# Allegro board pultonpcbtest.brd
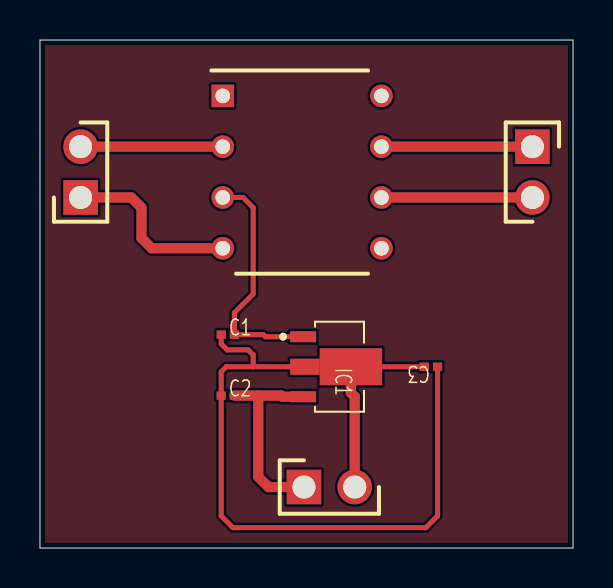
[diagram p0: board, top side]
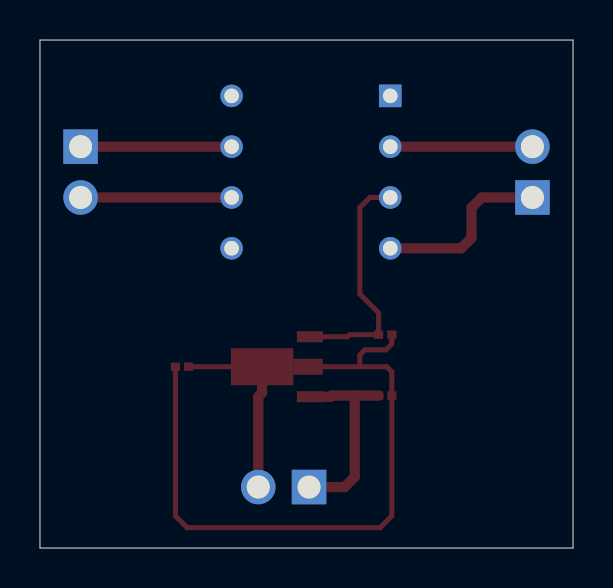
[diagram p1: board, bottom side, seen from below]

Outline 26.67 x 25.4 mm; copper layers: TOP, BOTTOM. Coordinates in mm from the lower left corner of the outline.
Outline path: 0,25.4 0,0 26.67,0 26.67,25.4 0,25.4

## Design rules (mm)
constraint set DEFAULT: min track width 0.127

## Placement (name value [footprint] x y rotation side)
C1  GRM033D70E105ME15D  [CAPC0603X33N]  9.4 10.67 0 top
C2  GRM033D70E105ME15D  [CAPC0603X33N]  9.4 7.62 0 top
C3  GRM033D70E105ME15D  [CAPC0603X33N]  19.56 9.06 180 top
IC1  AP7381-50Y-13  [AP738133Y13]  13.56 9.06 270 top
IC2  LM741CN_NOPB  [DIP794W53P254L959H508Q8N]  9.14 22.61 0 top
J1  67996-100HLF  [HDRV2W67P254_2X1_254X483X858P]  2.03 17.53 0 top
J2  67996-100HLF  [HDRV2W67P254_2X1_254X483X858P]  13.21 3.05 270 top
J3  67996-100HLF  [HDRV2W67P254_2X1_254X483X858P]  24.64 20.07 180 top

## Library data of the parts
C1-C3 = GRM033D70E105ME15D
IC1 = AP7381-50Y-13
IC2 = LM741CN_NOPB
J1-J3 = 67996-100HLF

## Footprints (pads in the part's own frame, mm; a bottom-side part is the same pattern mirrored in y, then rotated)
AP738133Y13
  rect 0.55x1.3 smd: 1(-1.5,-0.394) 3(1.5,-0.394)
  rect 0.8x1.475 smd: 2(0,-0.306)
  rect 1.85x3.125 smd: 4(0,1.994)
CAPC0603X33N
  rect 0.46x0.42 smd: 1(-0.33,0) 2(0.33,0)
DIP794W53P254L959H508Q8N
  rect 1.13x1.13 hole 0.73: 1(0,0)
  round 1.13 hole 0.73: 2(0,-2.54) 3(0,-5.08) 4(0,-7.62) 5(7.94,-7.62) 6(7.94,-5.08) 7(7.94,-2.54) 8(7.94,0)
HDRV2W67P254_2X1_254X483X858P
  rect 1.725x1.725 hole 1.15: 1(0,0)
  round 1.725 hole 1.15: 2(0,2.54)

## Nets
GND: C1.1 C2.1 C3.1 IC1.2
N01311: C2.2 IC1.3 J2.1
N01415: C3.2 IC1.4 J2.2
N01487: C1.2 IC1.1(VOUT) IC2.3
N01663: IC2.2 J1.2
N01689: IC2.4(V-) J1.1
N01829: IC2.7 J3.1
N01833: IC2.6 J3.2

Pads without a net: IC2 1 5 8

## Routing (per net, layer and track width the routed paths; a pad name or vN(x,y) marks a point on that pad's centre or on a via; arc(x,y) is an arc through that point)
GND: length 33.2
  TOP w0.254: 10.67,9.06 10.67,9.65 10.41,9.91 9.37,9.91 9.07,10.2 C1.1 ; 10.67,9.06 IC1.2 ; 10.67,9.06 9.32,9.06 9.07,8.81 C2.1 9.07,1.6 9.65,1.02 19.3,1.02 19.89,1.6 C3.1
N01311: length 10
  TOP w0.512: C2.2 10.92,7.62 ; 10.92,7.62 10.92,3.56 11.43,3.05 J2.1 ; 10.92,7.62 12.08,7.62 12.13,7.56 IC1.3
N01415: length 9.8
  TOP w0.254: C3.2 IC1.4
  TOP w0.512: J2.2 15.75,7.56 15.56,7.76 IC1.4
N01487: length 12
  TOP w0.254: IC2.3 10.16,17.53 10.67,17.02 10.67,12.7 9.73,11.76 C1.2 11.18,10.67 11.28,10.56 IC1.1
N01663: length 7.1
  TOP w0.512: J1.2 IC2.2
N01689: length 9.1
  TOP w0.512: J1.1 4.57,17.53 5.08,17.01 5.08,15.5 5.59,14.99 IC2.4
N01829: length 7.6
  TOP w0.512: J3.1 IC2.7
N01833: length 7.6
  TOP w0.512: IC2.6 J3.2

## Copper pours and planes (outline as drawn; the poured copper is in the pictures)
Net_1 on TOP: 0.25,25.15 0.25,0.25 26.42,0.25 26.42,25.15
